# Altium PCB PCB 12口5.08端子.pcbdoc
Units mm, origin at the board's own origin, x right, y up, seen from the top; angles counter-clockwise.
Board outline 118.36 x 68.71 mm, 2 copper layers (Top Layer, Bottom Layer); 16 components, 32 nets, 44 pads, 0 vias.
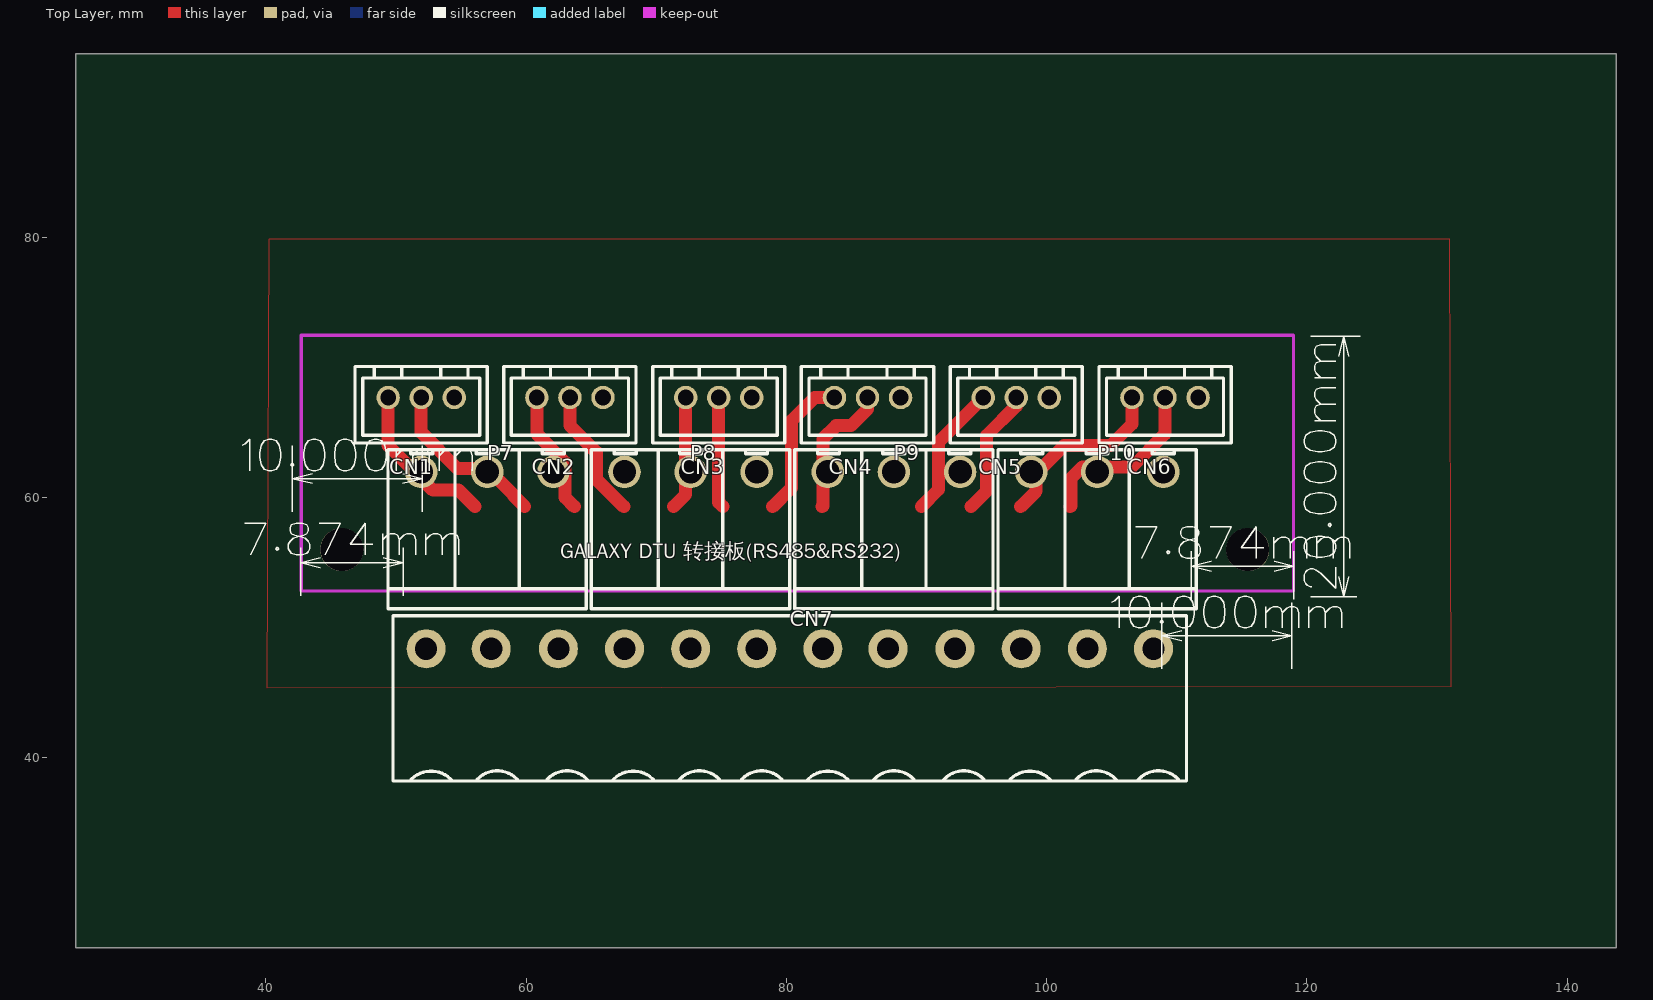
[diagram p0: Top Layer view]
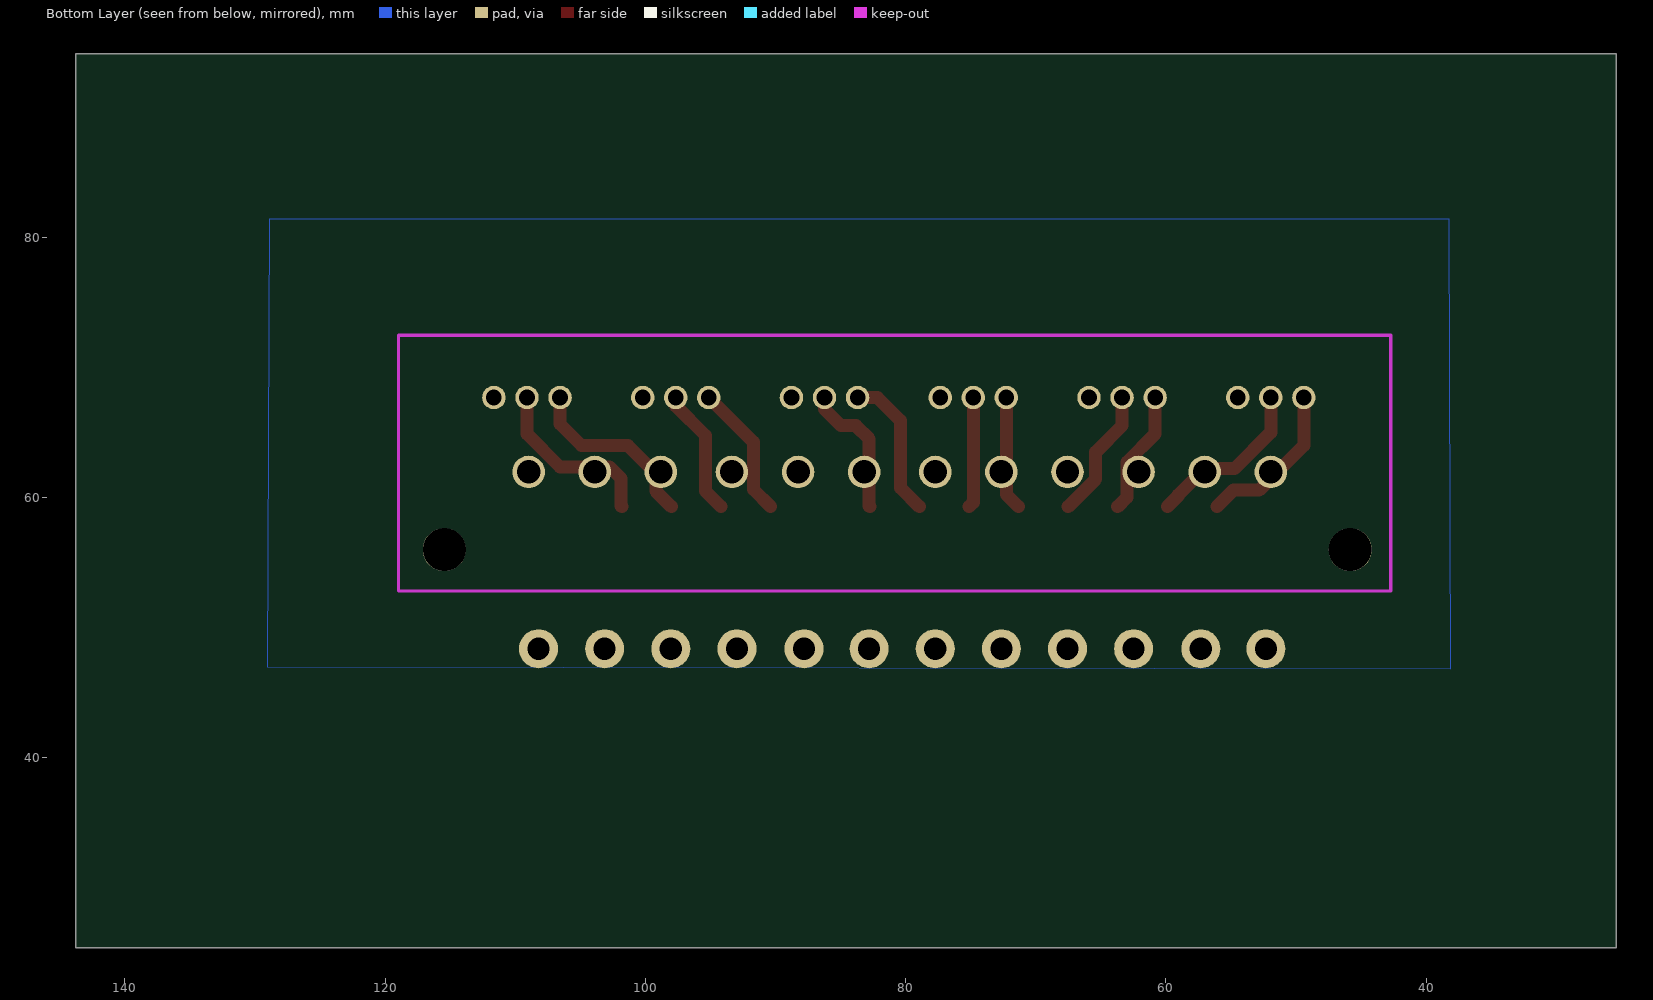
[diagram p1: Bottom Layer view, seen from below]

## Layer stack, top to bottom
Top Layer: signal copper (thickness not stored)
Dielectric: dielectric 0.32, FR-4, Dk 4.8
Bottom Layer: signal copper (thickness not stored)

## Board outline
143.764,25.4 25.4,25.4 25.4,94.107 143.764,94.107

## Components (designator, comment, footprint, x,y, rotation, side; value= is the part's Value field where it differs from the comment)
CN1 "A2501WV-3P" A2501WV-3P 51.943,67.691 r180 top
CN2 "A2501WV-3P" A2501WV-3P 63.373,67.691 r180 top
CN3 "A2501WV-3P" A2501WV-3P 74.803,67.691 r180 top
CN4 "A2501WV-3P" A2501WV-3P 86.233,67.691 r180 top
CN5 "A2501WV-3P" A2501WV-3P 97.663,67.691 r180 top
CN6 "A2501WV-3P" A2501WV-3P 109.093,67.691 r180 top
CN7 "WJ2EDGRC-5.08-12P" WJ2EDGRC-5.08-12P 80.264,48.387 r0 top
P7 "2EDGR-5.08-3P" 2EDGR-5.08-3P 57.023,61.976 r0 top
P8 "2EDGR-5.08-3P" 2EDGR-5.08-3P 72.644,61.976 r0 top
P9 "2EDGR-5.08-3P" 2EDGR-5.08-3P 88.265,61.976 r0 top
P10 "2EDGR-5.08-3P" 2EDGR-5.08-3P 103.886,61.976 r0 top
? "" ? 121.932,62.39 r0 top
? "" ? 47.037,61.716 r0 top
? "" ? 113.839,49.651 r0 top
? "" ? 115.062,54.964 r0 top
? "" ? 46.609,55.239 r0 top

## Footprints (in the part's own frame and the unit in brackets; to place one, negate y for a bottom-side part, rotate by r counter-clockwise, add the part's x,y. Pads: shape width x height; smd on the part's side, far side on the other; paste and mask are expansions set on the pad)
2EDGR-5.08-3P [mm]
  round 2.5 hole 1.8: 1(-5.08,0) 2(0,0) 3(5.08,0)
  silkscreen extent -7.63,-10.5 7.61,1.7
A2501WV-3P [mm]
  round 1.8 hole 1.2: 1(2.54,0) 2(0,0) 3(-2.54,0)
  silkscreen extent -5.08,-2.38 5.08,3.5
WJ2EDGRC-5.08-12P [mm]
  round 3 hole 1.7: 1(-27.94,0) 2(-22.941,0) 3(-17.78,0) 4(-12.7,0) 5(-7.62,0) 6(-2.54,0) 7(2.54,0) 8(7.539,0) 9(12.7,0) 10(17.78,0) 11(22.86,0) 12(27.94,0)
  silkscreen extent -30.48,-10.16 30.48,2.54
? [mm]
  silkscreen extent -2.15,-10 2.15,10

## Free pads (board coordinates)
  round 3.302 hole 3.302 unplated: ""(45.847,56.007) ""(115.443,56.007)

## Nets (pads, with @x,y where several pads share a name; then routed paths per layer and width w, separated by ;. In a path a pad name is that pad's centre, name@x,y a point inside that pad or via, vN(x,y) a via of type N, cw(c..) or ccw(c..) an arc to the next point about the centre after c; other vN are vias at no path point)
A1: CN1.1 | length 12.3
  Top Layer w1: CN1.1 49.403,64.008 52.832,60.579 54.816,60.579 56.086,59.309
A2: CN2.1 | length 9.6
  Top Layer w1: CN2.1 60.833,64.897 62.992,62.738 62.992,60.023 63.706,59.309
A3: CN3.1 | length 8.8
  Top Layer w1: 71.326,59.309 72.263,60.246 CN3.1
A4: CN4.1 | length 11.2
  Top Layer w1: 78.946,59.309 80.391,60.754 80.391,65.913 82.169,67.691 CN4.1
B1: CN1.2 | length 13
  Top Layer w1: CN1.2 51.943,65.024 54.737,62.23 57.023,62.23 59.055,60.198 59.055,60.15 59.896,59.309
B2: CN2.2 | length 10.1
  Top Layer w1: CN2.2 63.373,65.532 65.405,63.5 65.405,61.42 67.516,59.309
B3: CN3.2 | length 8.5
  Top Layer w1: CN3.2 74.803,59.642 75.136,59.309
B4: CN4.2 | length 10.5
  Top Layer w1: 82.756,59.309 82.804,59.357 82.804,64.516 83.82,65.532 84.963,65.532 86.233,66.802 CN4.2
CN7_1: CN7.1
CN7_2: CN7.2
CN7_3: CN7.3
CN7_4: CN7.4
CN7_5: CN7.5
CN7_6: CN7.6
CN7_7: CN7.7
CN7_8: CN7.8
CN7_9: CN7.9
CN7_10: CN7.10
CN7_11: CN7.11
CN7_12: CN7.12
GND: CN1.3 CN2.3 CN3.3 CN4.3 CN5.3 CN6.3
R1: CN5.2 | length 9.8
  Top Layer w1: 94.186,59.309 95.377,60.5 95.377,64.77 97.663,67.056 CN5.2
R2: CN6.2 | length 13.6
  Top Layer w1: 101.806,59.309 101.854,59.357 101.854,61.468 102.743,62.357 106.553,62.357 109.093,64.897 CN6.2
S$18: 
S$20: 
S$24: 
S$26: 
S$28: 
S$30: 
S$5479: 
T1: CN5.1 | length 10.3
  Top Layer w1: 90.376,59.309 91.694,60.627 91.694,64.262 CN5.1
T2: CN6.1 | length 14
  Top Layer w1: 97.996,59.309 99.187,60.5 99.187,61.849 101.346,64.008 104.902,64.008 106.553,65.659 CN6.1
pads on no net: P7.1 P7.2 P7.3 P8.1 P8.2 P8.3 P9.1 P9.2 P9.3 P10.1 P10.2 P10.3

## Polygon pours and split planes (outlines as drawn)
GND on Bottom Layer (solid): 38.227,81.407 128.905,81.407 129.032,46.99 38.1,46.863 38.227,81.407
GND on Top Layer (solid): 40.259,79.883 130.937,79.883 131.064,45.466 40.132,45.339 40.259,79.883

## Silkscreen, mask and mechanical layers (free items; w line width, h text height)
Top Overlay:
  text "GALAXY DTU 转接板(RS485&RS232)" at 62.631,54.925 h2.03